# Altium PCB PCB1.PcbDoc
Units mm, origin at the board's own origin, x right, y up, seen from the top; angles counter-clockwise.
Board outline 201.68 x 78.94 mm, 2 copper layers (Top Layer, Bottom Side), stack 0.302 mm thick; 18 components, 48 nets, 160 pads, 16 vias.
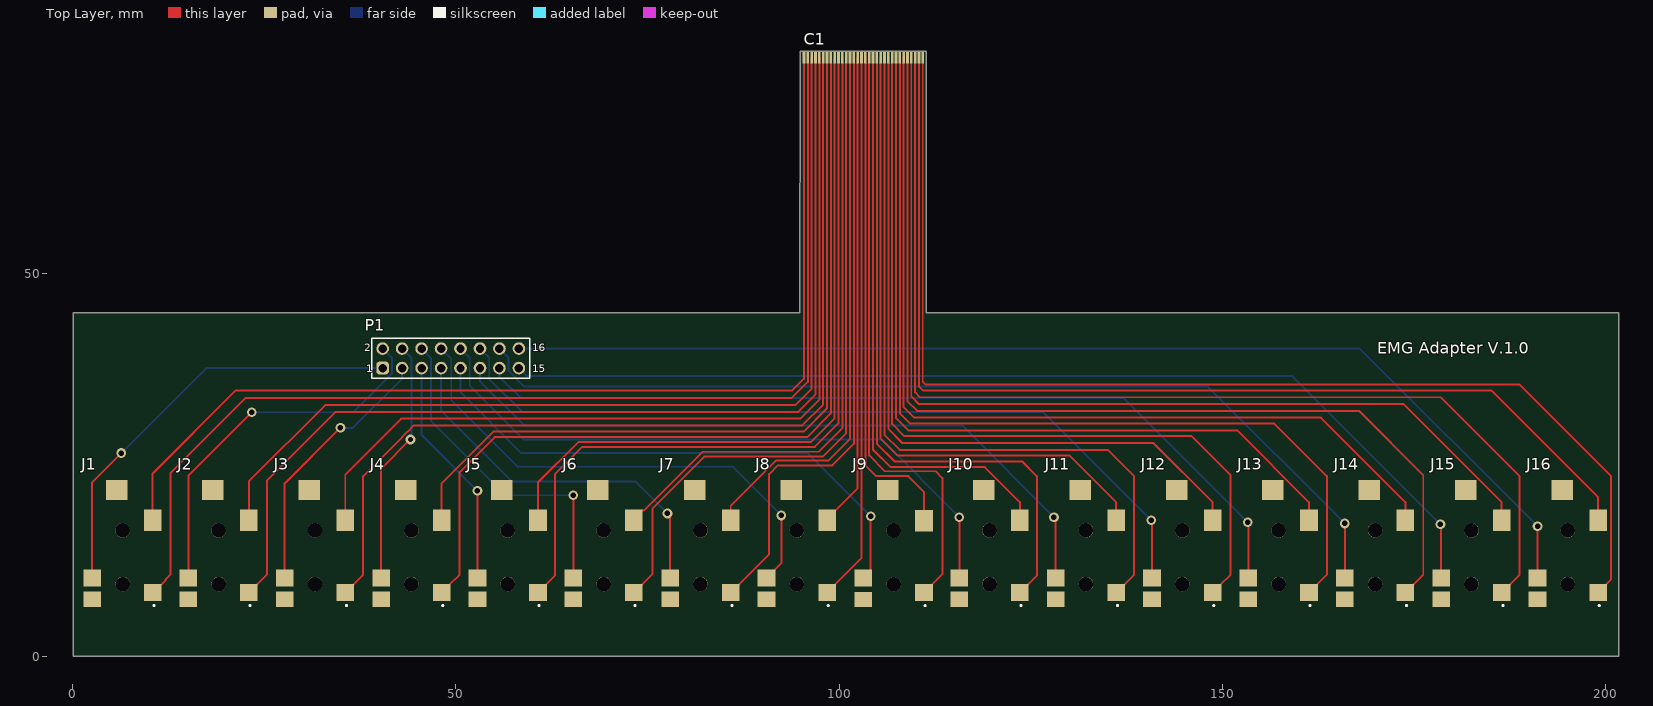
[diagram p0: Top Layer view]
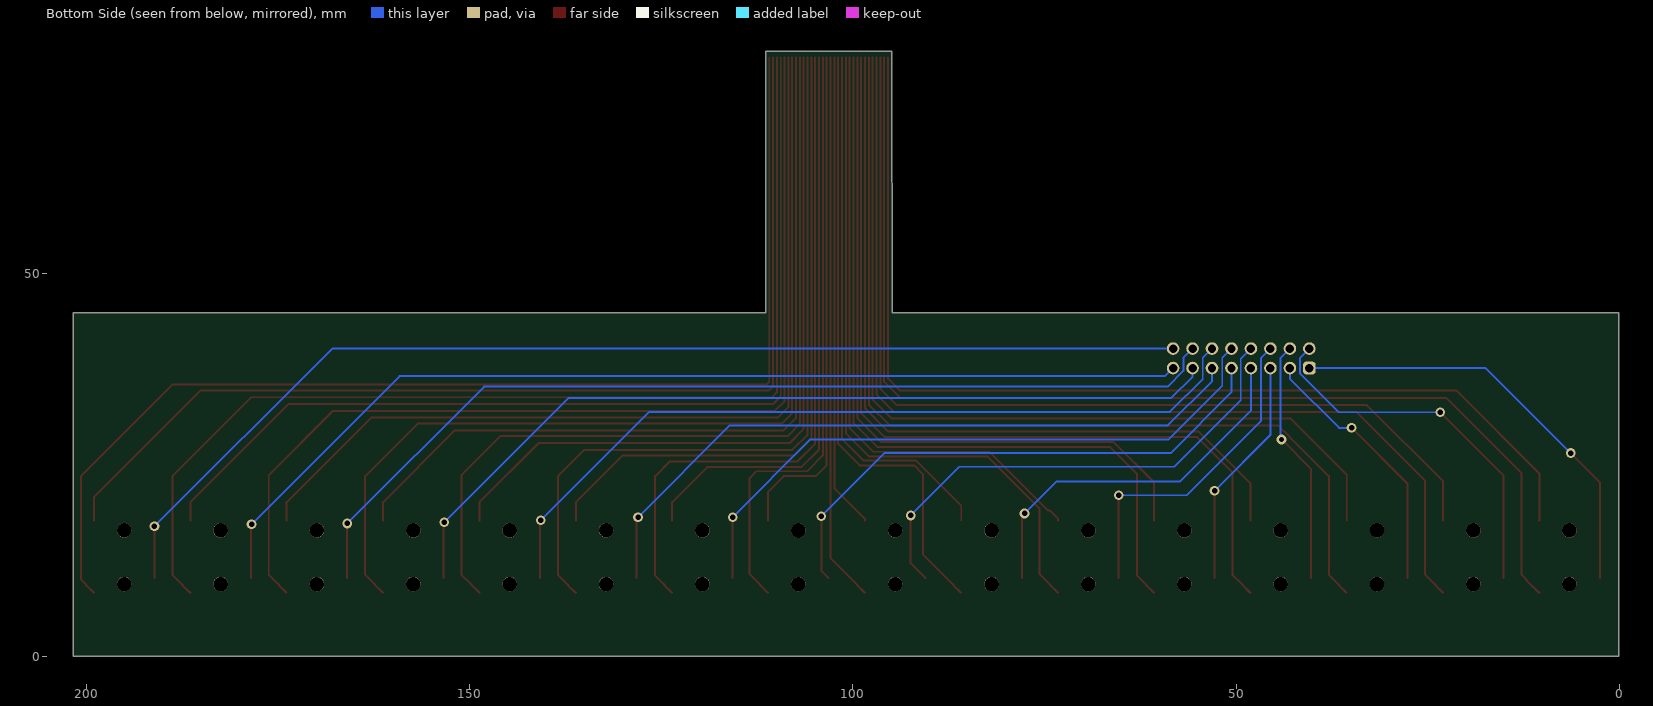
[diagram p1: Bottom Side view, seen from below]

## Layer stack, top to bottom
Top Silkscreen: prepreg 0.001, PP-006, Dk 4.1
Top Polymide: prepreg 0.025, PP-006, Dk 4.1
Top Adhesive: prepreg 0.025, PP-006, Dk 4.1
Top Layer: signal copper 0.035
Polyimide: core 0.025, Polymid, Dk 3.3
Bottom Side: signal copper 0.035
Bottom Adhesive: prepreg 0.025, PP-002, Dk 3.8
Bottom Polymide: prepreg 0.025, PP-006, Dk 2.9
Bottom Silkscreen: prepreg 0.001, PP-006, Dk 4.1
Stiffener: core 0.105, WE-CO-0041, Dk 3.8

## Board outline
0.05,0.05 0.05,44.881 94.874,44.881 94.894,78.793 cw(c95.095,78.793) 95.095,78.994 95.093,78.994 111.173,78.994 cw(c111.173,78.794) 111.373,78.794 111.374,78.794 111.374,44.881 111.378,44.881 201.726,44.881 201.726,0.05

## Design rules (kind name [scope] priority, off if disabled: settings)
AssemblyTestPointUsage [All] p0: scope1count=1 scope1_0_kind=Board scope1_0_value=Board scope2count=1 scope2_0_kind=Board scope2_0_value=Board commentlength=0
AssemblyTestpoint [All] p0: scope1count=1 scope1_0_kind=Board scope1_0_value=Board scope2count=1 scope2_0_kind=Board scope2_0_value=Board commentlength=0
Clearance [All] p0: scope1count=1 scope1_0_kind=Board scope1_0_value=Board scope2count=1 scope2_0_kind=Board scope2_0_value=Board commentlength=0 gap=0.254
Clearance [All] p1: gap=0.254 ignorepadtopadclearanceinfootprint=FALSE except(0: Arc-Hole Track-Hole SMDPad-Hole THPad-Hole Via-Hole Fill-Hole Poly-Hole Region-Hole Text-Hole; 0.126: Arc-Text Track-Text SMDPad-Text THPad-Text Via-Text Fill-Text Poly-Text Region-Text Text-Text; 0.15: Arc-Arc Arc-Track Arc-SMDPad Track-Track Track-SMDPad SMDPad-SMDPad)
ComponentClearance [All] p0: scope1count=1 scope1_0_kind=Board scope1_0_value=Board scope2count=1 scope2_0_kind=Board scope2_0_value=Board commentlength=0 gap=0.254 collisioncheckmode=3
DiffPairsRouting [All] p0: scope1count=1 scope1_0_kind=Board scope1_0_value=Board scope2count=1 scope2_0_kind=Board scope2_0_value=Board commentlength=0
DiffPairsRouting [All] p1: maxlimit=0.254 minlimit=0.254 mostfreqgap=0.254 substack1={173900B3-F3EC-4367-9330-280F2AB1E980} toplayer_{173900b3-f3ec-4367-9330-280f2ab1e980}_minwidth=0.381 toplayer_{173900b3-f3ec-4367-9330-280f2ab1e980}_maxwidth=0.381 toplayer_{173900b3-f3ec-4367-9330-280f2ab1e980}_prefwidth=0.381 bottomlayer_{173900b3-f3ec-4367-9330-280f2ab1e980}_minwidth=0.381 bottomlayer_{173900b3-f3ec-4367-9330-280f2ab1e980}_maxwidth=0.381 bottomlayer_{173900b3-f3ec-4367-9330-280f2ab1e980}_prefwidth=0.381 toplayer_minwidth=0.381 toplayer_maxwidth=0.381 toplayer_prefwidth=0.381 bottomlayer_minwidth=0.381 bottomlayer_maxwidth=0.381 bottomlayer_prefwidth=0.381 maxuncoupledlength=12.7
FabricationTestPointUsage [All] p0: scope1count=1 scope1_0_kind=Board scope1_0_value=Board scope2count=1 scope2_0_kind=Board scope2_0_value=Board commentlength=0 valid=0 allowmultiple=FALSE
FabricationTestpoint [All] p0: scope1count=1 scope1_0_kind=Board scope1_0_value=Board scope2count=1 scope2_0_kind=Board scope2_0_value=Board commentlength=0 side=3 testpointundercomponent=TRUE minsize=1.016 maxsize=2.54 preferedsize=1.524 minholesize=0 maxholesize=1.016 preferedholesize=0.813 testpointgrid=0.025
FanoutControl Fanout_BGA [All] p0 off: scope1count=1 scope1_0_kind=Board scope1_0_value=Board scope2count=1 scope2_0_kind=Board scope2_0_value=Board commentlength=69 // Protel DXP Scope 1 Expression Was: IsBGA   Fanout_BGA (Default Rule)
FanoutControl Fanout_LCC [All] p0 off: scope1count=1 scope1_0_kind=Board scope1_0_value=Board scope2count=1 scope2_0_kind=Board scope2_0_value=Board commentlength=69 // Protel DXP Scope 1 Expression Was: IsLCC   Fanout_LCC (Default Rule)
FanoutControl Fanout_SOIC [All] p0 off: scope1count=1 scope1_0_kind=Board scope1_0_value=Board scope2count=1 scope2_0_kind=Board scope2_0_value=Board commentlength=71 // Protel DXP Scope 1 Expression Was: IsSOIC   Fanout_SOIC (Default Rule)
FanoutControl Fanout_Small [All] p0 off: scope1count=1 scope1_0_kind=Board scope1_0_value=Board scope2count=1 scope2_0_kind=Board scope2_0_value=Board commentlength=84 // Protel DXP Scope 1 Expression Was: (CompPinCount < 5)   Fanout_Small (Default Rule)
FanoutControl Fanout_Default [All] p0: scope1count=1 scope1_0_kind=Board scope1_0_value=Board scope2count=1 scope2_0_kind=Board scope2_0_value=Board commentlength=30 // Fanout_Default (Default Rule)
Height [All] p0: scope1count=1 scope1_0_kind=Board scope1_0_value=Board scope2count=1 scope2_0_kind=Board scope2_0_value=Board commentlength=0
HoleSize [All] p0: scope1count=1 scope1_0_kind=Board scope1_0_value=Board scope2count=1 scope2_0_kind=Board scope2_0_value=Board commentlength=0 absolutevalues=TRUE maxlimit=2.54 minlimit=0.025 maxpercent=80.000 minpercent=20.000
HoleToHoleClearance [All] p0: scope1count=1 scope1_0_kind=Board scope1_0_value=Board scope2count=1 scope2_0_kind=Board scope2_0_value=Board commentlength=0
LayerPairs [All] p0: scope1count=1 scope1_0_kind=Board scope1_0_value=Board scope2count=1 scope2_0_kind=Board scope2_0_value=Board commentlength=0 enforce=TRUE
MinimumSolderMaskSliver [All] p0: scope1count=1 scope1_0_kind=Board scope1_0_value=Board scope2count=1 scope2_0_kind=Board scope2_0_value=Board commentlength=0
NetAntennae [All] p0: scope1count=1 scope1_0_kind=Board scope1_0_value=Board scope2count=1 scope2_0_kind=Board scope2_0_value=Board commentlength=0
PasteMaskExpansion [All] p0: scope1count=1 scope1_0_kind=Board scope1_0_value=Board scope2count=1 scope2_0_kind=Board scope2_0_value=Board commentlength=0 expansion=0
PlaneClearance [All] p0: scope1count=1 scope1_0_kind=Board scope1_0_value=Board scope2count=1 scope2_0_kind=Board scope2_0_value=Board commentlength=0 clearance=0.508
PlaneConnect [All] p0: scope1count=1 scope1_0_kind=Board scope1_0_value=Board scope2count=1 scope2_0_kind=Board scope2_0_value=Board commentlength=0 planeconnectstyle=Relief reliefexpansion=0.508 reliefentries=4 reliefconductorwidth=0.254 reliefairgap=0.254
PolygonConnect [All] p0: scope1count=1 scope1_0_kind=Board scope1_0_value=Board scope2count=1 scope2_0_kind=Board scope2_0_value=Board commentlength=0 connectstyle=Relief reliefconductorwidth=0.254 reliefentries=4 polygonreliefangle="90 Angle"
PolygonConnect [All] p1: connectstyle=Relief reliefconductorwidth=0.254 reliefentries=4 polygonreliefangle="90 Angle" airgapwidth=0.254
RoutingCorners [All] p0: scope1count=1 scope1_0_kind=Board scope1_0_value=Board scope2count=1 scope2_0_kind=Board scope2_0_value=Board commentlength=0 cornerstyle=45-Degree minsetback=2.54 maxsetback=2.54
RoutingLayers [All] p0: scope1count=1 scope1_0_kind=Board scope1_0_value=Board scope2count=1 scope2_0_kind=Board scope2_0_value=Board commentlength=0 top layer=Automatic bottom layer=Automatic
RoutingPriority [All] p0: scope1count=1 scope1_0_kind=Board scope1_0_value=Board scope2count=1 scope2_0_kind=Board scope2_0_value=Board commentlength=0
RoutingTopology [All] p0: scope1count=1 scope1_0_kind=Board scope1_0_value=Board scope2count=1 scope2_0_kind=Board scope2_0_value=Board commentlength=0 topology=Shortest
RoutingVias [All] p0: scope1count=1 scope1_0_kind=Board scope1_0_value=Board scope2count=1 scope2_0_kind=Board scope2_0_value=Board commentlength=0 holewidth=0.711 width=1.27 viastyle="Through Hole" minholewidth=0.711 minwidth=1.27 maxholewidth=0.711 maxwidth=1.27
RoutingVias [All] p1: holewidth=0.711 width=1.27 viastyle="Through Hole" minholewidth=0.711 minwidth=1.27 maxholewidth=0.711 maxwidth=1.27
ShortCircuit [All] p0: scope1count=1 scope1_0_kind=Board scope1_0_value=Board scope2count=1 scope2_0_kind=Board scope2_0_value=Board commentlength=0 allowed=FALSE
SilkToBoardRegionClearance [All] p0: scope1count=1 scope1_0_kind=Board scope1_0_value=Board scope2count=1 scope2_0_kind=Board scope2_0_value=Board commentlength=0
SilkToSilkClearance [All] p0: scope1count=1 scope1_0_kind=Board scope1_0_value=Board scope2count=1 scope2_0_kind=Board scope2_0_value=Board commentlength=0
SilkToSilkClearance [All] p1: silktosilkclearance=0.126
SilkToSolderMaskClearance [All] p0 off: scope1count=1 scope1_0_kind=Board scope1_0_value=Board scope2count=1 scope2_0_kind=Board scope2_0_value=Board commentlength=44 // Protel DXP Scope 1 Expression Was: IsPad
SolderMaskExpansion [All] p0: scope1count=1 scope1_0_kind=Board scope1_0_value=Board scope2count=1 scope2_0_kind=Board scope2_0_value=Board commentlength=0 expansion=0.102
SolderMaskExpansion [All] p1: expansion=0.102 istentingtop=FALSE
UnRoutedNet [All] p0: scope1count=1 scope1_0_kind=Board scope1_0_value=Board scope2count=1 scope2_0_kind=Board scope2_0_value=Board commentlength=0
UnpouredPolygon [All] p0: scope1count=1 scope1_0_kind=Board scope1_0_value=Board scope2count=1 scope2_0_kind=Board scope2_0_value=Board commentlength=0
Width [All] p0: scope1count=1 scope1_0_kind=Board scope1_0_value=Board scope2count=1 scope2_0_kind=Board scope2_0_value=Board commentlength=0 maxlimit=0.254 minlimit=0.254 preferedwidth=0.254
Width [All] p1: maxlimit=0.254 minlimit=0.254 preferedwidth=0.254 substack1={173900B3-F3EC-4367-9330-280F2AB1E980}
28 further rules are at their usual default settings.

## Components (designator, comment, footprint, x,y, rotation, side; value= is the part's Value field where it differs from the comment)
C1 "Male AFY5323" "Male AFY5323" 103.154,78.155 r180 top
J1 "Phone Connectors 3.5mm Audio Jack SMT 3cond Tip/Ring swtch   Source:  Datasheet" SJ23593DSMTTR 6.512,13.258 r90 top
J2 "Phone Connectors 3.5mm Audio Jack SMT 3cond Tip/Ring swtch   Source:  Datasheet" SJ23593DSMTTR 19.035,13.258 r90 top
J3 "Phone Connectors 3.5mm Audio Jack SMT 3cond Tip/Ring swtch   Source:  Datasheet" SJ23593DSMTTR 31.608,13.258 r90 top
J4 "Phone Connectors 3.5mm Audio Jack SMT 3cond Tip/Ring swtch   Source:  Datasheet" SJ23593DSMTTR 44.181,13.258 r90 top
J5 "Phone Connectors 3.5mm Audio Jack SMT 3cond Tip/Ring swtch   Source:  Datasheet" SJ23593DSMTTR 56.754,13.258 r90 top
J6 "Phone Connectors 3.5mm Audio Jack SMT 3cond Tip/Ring swtch   Source:  Datasheet" SJ23593DSMTTR 69.265,13.258 r90 top
J7 "Phone Connectors 3.5mm Audio Jack SMT 3cond Tip/Ring swtch   Source:  Datasheet" SJ23593DSMTTR 81.9,13.258 r90 top
J8 "Phone Connectors 3.5mm Audio Jack SMT 3cond Tip/Ring swtch   Source:  Datasheet" SJ23593DSMTTR 94.473,13.258 r90 top
J9 "Phone Connectors 3.5mm Audio Jack SMT 3cond Tip/Ring swtch   Source:  Datasheet" SJ23593DSMTTR 107.111,13.248 r90 top
J10 "Phone Connectors 3.5mm Audio Jack SMT 3cond Tip/Ring swtch   Source:  Datasheet" SJ23593DSMTTR 119.619,13.258 r90 top
J11 "Phone Connectors 3.5mm Audio Jack SMT 3cond Tip/Ring swtch   Source:  Datasheet" SJ23593DSMTTR 132.192,13.258 r90 top
J12 "Phone Connectors 3.5mm Audio Jack SMT 3cond Tip/Ring swtch   Source:  Datasheet" SJ23593DSMTTR 144.765,13.258 r90 top
J13 "Phone Connectors 3.5mm Audio Jack SMT 3cond Tip/Ring swtch   Source:  Datasheet" SJ23593DSMTTR 157.338,13.258 r90 top
J14 "Phone Connectors 3.5mm Audio Jack SMT 3cond Tip/Ring swtch   Source:  Datasheet" SJ23593DSMTTR 169.911,13.258 r90 top
J15 "Phone Connectors 3.5mm Audio Jack SMT 3cond Tip/Ring swtch   Source:  Datasheet" SJ23593DSMTTR 182.484,13.258 r90 top
J16 "Phone Connectors 3.5mm Audio Jack SMT 3cond Tip/Ring swtch   Source:  Datasheet" SJ23593DSMTTR 195.057,13.258 r90 top
P1 "61301621121" 61301621121 49.326,38.912 r0 top

## Footprints (in the part's own frame and the unit in brackets; to place one, negate y for a bottom-side part, rotate by r counter-clockwise, add the part's x,y. Pads: shape width x height; smd on the part's side, far side on the other; paste and mask are expansions set on the pad)
61301621121 [mm] "Pin Header, pitch 2.54 mm, THT, Vertical, dual row, 16p"
  rrect50% 1.65x1.65 hole 1.1: 1(-8.89,-1.27)
  round 1.65 hole 1.1: 2(-8.89,1.27) 3(-6.35,-1.27) 4(-6.35,1.27) 5(-3.81,-1.27) 6(-3.81,1.27) 7(-1.27,-1.27) 8(-1.27,1.27) 9(1.27,-1.27) 10(1.27,1.27) 11(3.81,-1.27) 12(3.81,1.27) 13(6.35,-1.27) 14(6.35,1.27) 15(8.89,-1.27) 16(8.89,1.27)
  silkscreen extent -10.31,-2.62 10.31,2.62
"Male AFY5323" [mm]
  rect 0.35x1.6 smd: 1(-7.75,0) 2(-7.25,0) 3(-6.75,0) 4(-6.25,0) 5(-5.75,0) 6(-5.25,0) 7(-4.75,0) 8(-4.25,0) 9(-3.75,0) 10(-3.25,0) 11(-2.75,0) 12(-2.25,0) 13(-1.75,0) 14(-1.25,0) 15(-0.75,0) 16(-0.25,0) 17(0.25,0) 18(0.75,0) 19(1.25,0) 20(1.75,0) 21(2.25,0) 22(2.75,0) 23(3.25,0) 24(3.75,0) 25(4.25,0) 26(4.75,0) 27(5.25,0) 28(5.75,0) 29(6.25,0) 30(6.75,0) 31(7.25,0) 32(7.75,0)
SJ23593DSMTTR [mm]
  rect 2.2x2.3 smd: 1(-4.9,-3.95) 3(-3,3.95)
  rect 2.8x2.3 smd: 2(4.5,-3.95)
  rect 2.6x2.8 smd: 4(8.5,0.75)
  rect 2x2.3 smd: 5(-5.8,3.95)
  round 1.9 hole 1.9 unplated: MH1(-3.8,0) MH2(3.2,0)
  silkscreen extent -6.7,-4.2 -6.5,-4

## Part data
J1 J2 J3 J4 J5 J6 J7 J8 J9 J10 J11 J12 J13 J14 J15 J16: library part SJ2-3593D-SMT-TR
P1: library part CMP-1502-01097-2

## Via types
v1: diameter 1.27, hole 0.711, Top Layer to Bottom Side, 16 vias

## Nets (pads, with @x,y where several pads share a name; then routed paths per layer and width w, separated by ;. In a path a pad name is that pad's centre, name@x,y a point inside that pad or via, vN(x,y) a via of type N, cw(c..) or ccw(c..) an arc to the next point about the centre after c; other vN are vias at no path point)
NetC1_1: C1.1 J16.1 | length 153.1
  Top Layer w0.254: C1.1 110.904,35.881 111.302,35.483 188.772,35.483 200.71,23.545 200.71,10.061 200.03,9.381 200.03,9.331 199.057,8.358 J16.1
NetC1_2: C1.2 J16.2 | length 140.5
  Top Layer w0.254: C1.2 110.404,35.238 110.921,34.721 185.089,34.721 199.007,20.803 J16.2
NetC1_3: C1.3 J15.1 | length 143.3
  Top Layer w0.254: C1.3 109.904,34.468 110.54,33.832 178.485,33.832 188.772,23.545 188.772,10.696 187.457,9.381 187.457,9.331 186.484,8.358 J15.1
NetC1_4: C1.4 J15.2 | length 129.3
  Top Layer w0.254: C1.4 109.404,33.952 110.413,32.943 173.641,32.943 186.434,20.15 J15.2
NetC1_5: C1.5 J14.1 | length 132.4
  Top Layer w0.254: C1.5 108.904,33.309 110.159,32.054 167.817,32.054 176.199,23.672 176.199,10.696 174.884,9.381 174.884,9.331 173.911,8.358 J14.1
NetC1_6: C1.6 J14.2 | length 118.6
  Top Layer w0.254: C1.6 108.404,32.539 109.778,31.165 162.846,31.165 173.861,20.15 J14.2
NetC1_7: C1.7 J13.1 | length 121.7
  Top Layer w0.254: C1.7 107.904,31.769 109.27,30.403 156.768,30.403 163.626,23.545 163.626,10.696 162.311,9.381 162.311,9.331 161.338,8.358 J13.1
NetC1_8: C1.8 J13.2 | length 107.9
  Top Layer w0.254: C1.8 107.404,31.126 109.016,29.514 151.924,29.514 161.288,20.15 J13.2
NetC1_9: C1.9 J12.1 | length 111
  Top Layer w0.254: C1.9 106.904,30.356 108.508,28.752 145.973,28.752 151.053,23.672 151.053,10.696 149.738,9.381 149.738,9.331 148.765,8.358 J12.1
NetC1_10: C1.10 J12.2 | length 97.1
  Top Layer w0.254: C1.10 106.404,29.713 108.254,27.863 141.002,27.863 148.715,20.15 J12.2
NetC1_11: C1.11 J11.1 | length 100.2
  Top Layer w0.254: C1.11 105.904,28.943 107.873,26.974 135.051,26.974 138.48,23.545 138.48,10.696 137.165,9.381 137.165,9.331 136.192,8.358 J11.1
NetC1_12: C1.12 J11.2 | length 86.3
  Top Layer w0.254: C1.12 105.404,28.427 107.619,26.212 130.08,26.212 136.142,20.15 J11.2
NetC1_13: C1.13 J10.1 | length 89.1
  Top Layer w0.254: C1.13 104.904,27.784 107.238,25.45 123.875,25.45 125.78,23.545 125.78,10.569 124.592,9.381 124.592,9.331 123.619,8.358 J10.1
NetC1_14: C1.14 J10.2 | length 75.5
  Top Layer w0.254: C1.14 104.404,27.014 106.707,24.711 119.008,24.711 123.569,20.15 J10.2
NetC1_15: C1.15 J9.1 | length 78.7
  Top Layer w0.254: C1.15 103.904,26.244 105.968,24.18 112.572,24.18 113.461,23.291 113.461,10.748 112.084,9.371 112.084,9.321 111.111,8.348 J9.1
NetC1_16: C1.16 J9.2 | length 66
  Top Layer w0.254: C1.16 103.404,24.966 104.825,23.545 109.016,23.545 111.061,21.5 J9.2
NetC1_17: C1.17 J8.1 | length 71.7
  Top Layer w0.254: J8.1 98.473,8.358 99.446,9.331 99.446,9.381 102.904,12.839 C1.17
NetC1_18: C1.18 J8.2 | length 62
  Top Layer w0.254: J8.2 98.423,18.008 102.404,21.989 C1.18
NetC1_19: C1.19 J7.1 | length 80.6
  Top Layer w0.254: J7.1 85.9,8.358 86.873,9.331 86.873,9.381 90.855,13.363 90.855,23.799 91.998,24.942 99.11,24.942 101.904,27.736 C1.19
NetC1_20: C1.20 J7.2 | length 70.9
  Top Layer w0.254: J7.2 85.85,19.683 91.744,25.577 98.602,25.577 101.404,28.379 C1.20
NetC1_21: C1.21 J6.1 | length 90.3
  Top Layer w0.254: J6.1 73.265,8.358 74.238,9.331 74.238,9.381 75.615,10.758 75.615,19.315 82.385,26.085 97.84,26.085 100.904,29.149 C1.21
NetC1_22: C1.22 J6.2 | length 80.7
  Top Layer w0.254: J6.2 73.215,18.008 74.238,19.031 74.488,19.031 82.177,26.72 97.332,26.72 100.404,29.792 C1.22
NetC1_23: C1.23 J5.1 | length 103.8
  Top Layer w0.254: J5.1 60.754,8.358 61.727,9.331 61.727,9.381 62.915,10.569 62.915,23.799 66.471,27.355 96.824,27.355 99.904,30.435 C1.23
NetC1_24: C1.24 J5.2 | length 94.2
  Top Layer w0.254: J5.2 60.704,22.731 65.963,27.99 96.316,27.99 99.404,31.078 C1.24
NetC1_25: C1.25 J4.1 | length 114.7
  Top Layer w0.254: J4.1 48.181,8.358 49.154,9.331 49.154,9.381 50.469,10.696 50.469,24.053 55.041,28.625 95.808,28.625 98.904,31.721 C1.25
NetC1_26: C1.26 J4.2 | length 105
  Top Layer w0.254: J4.2 48.131,22.604 54.914,29.387 95.427,29.387 98.404,32.364 C1.26
NetC1_27: C1.27 J3.1 | length 125.4
  Top Layer w0.254: J3.1 35.608,8.358 36.581,9.331 36.581,9.381 37.896,10.696 37.896,23.545 43.053,28.702 43.053,28.742 43.648,29.337 43.688,29.337 44.5,30.149 95.173,30.149 97.904,32.88 C1.27
NetC1_28: C1.28 J3.2 | length 116.5
  Top Layer w0.254: J3.2 35.558,23.747 42.849,31.038 94.919,31.038 97.404,33.523 C1.28
NetC1_29: C1.29 J2.1 | length 135.8
  Top Layer w0.254: J2.1 23.035,8.358 24.008,9.331 24.008,9.381 25.323,10.696 25.323,22.91 34.34,31.927 94.665,31.927 96.904,34.166 C1.29
NetC1_30: C1.30 J2.2 | length 126.7
  Top Layer w0.254: J2.2 22.985,22.858 32.943,32.816 94.284,32.816 96.404,34.936 C1.30
NetC1_31: C1.31 J1.1 | length 147
  Top Layer w0.254: J1.1@10.412,8.358 J1.1 10.512,8.358 12.112,9.958 12.112,10.058 12.75,10.696 12.75,23.926 22.529,33.705 93.776,33.705 95.904,35.833 C1.31
NetC1_32: C1.32 J1.2 | length 138.2
  Top Layer w0.254: J1.2 10.412,17.808 10.412,23.874 21.259,34.721 93.903,34.721 95.404,36.222 C1.32
Ring1: J1.3 P1.1 | length 56.6
  Top Layer w0.254: J1.3@2.512,10.258 2.512,22.705 v1(6.35,26.543)
  Bottom Side w0.254: v1(6.35,26.543) 17.449,37.642 P1.1
Ring2: J2.3 P1.2 | length 49.2
  Top Layer w0.254: J2.3 15.085,23.594 v1(23.368,31.877)
  Bottom Side w0.254: v1(23.368,31.877) 36.618,31.877 41.642,36.901 41.642,38.976 P1.2
Ring3: J3.3 P1.3 | length 34.7
  Top Layer w0.254: J3.3 27.658,22.578 v1(34.925,29.845)
  Bottom Side w0.254: v1(34.925,29.845) 36.56,29.845 42.976,36.261 P1.3
Ring4: J4.3 P1.4 | length 32.1
  Top Layer w0.254: J4.3 40.231,24.483 v1(44.069,28.321)
  Bottom Side w0.254: P1.4 44.182,38.976 44.182,28.434 v1(44.069,28.321)
Ring5: J5.3 P1.5 | length 30.4
  Top Layer w0.254: J5.3 v1(52.804,21.618)
  Bottom Side w0.254: P1.5 45.516,28.906 v1(52.804,21.618)
Ring6: J6.3 P1.6 | length 43.3
  Top Layer w0.254: J6.3 v1(65.315,21.045)
  Bottom Side w0.254: P1.6 46.722,38.976 46.722,30.748 56.425,21.045 v1(65.315,21.045)
Ring7: J7.3 P1.7 | length 49.2
  Top Layer w0.254: v1(77.597,18.669) 77.95,18.316 J7.3
  Bottom Side w0.254: P1.7 48.056,32.081 57.277,22.86 73.406,22.86 v1(77.597,18.669)
Ring8: J8.3 P1.8 | length 65.6
  Top Layer w0.254: J8.3 90.573,10.258 91.546,11.231 91.546,11.281 92.456,12.191 v1(92.456,18.415)
  Bottom Side w0.254: P1.8 49.39,38.848 49.39,33.414 58.039,24.765 86.106,24.765 v1(92.456,18.415)
Ring9: J9.3 P1.9 | length 71.8
  Top Layer w0.254: J9.3 104.111,11.198 v1(104.111,18.312)
  Bottom Side w0.254: P1.9 50.596,34.494 58.547,26.543 95.88,26.543 v1(104.111,18.312)
Ring10: J10.3 P1.10 | length 84.3
  Top Layer w0.254: J10.3 v1(115.669,18.189)
  Bottom Side w0.254: P1.10 51.802,38.976 51.802,35.32 58.801,28.321 105.537,28.321 v1(115.669,18.189)
Ring11: J11.3 P1.11 | length 92
  Top Layer w0.254: v1(128.016,18.161) 128.242,17.935 J11.3
  Bottom Side w0.254: P1.11 53.136,35.92 58.907,30.149 116.028,30.149 v1(128.016,18.161)
Ring12: J12.3 P1.12 | length 106
  Top Layer w0.254: v1(140.716,17.78) 140.815,17.681 J12.3
  Bottom Side w0.254: P1.12 54.342,38.976 54.342,36.209 58.624,31.927 126.569,31.927 v1(140.716,17.78)
Ring13: J13.3 P1.13 | length 113.9
  Top Layer w0.254: v1(153.289,17.526) 153.388,17.427 J13.3
  Bottom Side w0.254: P1.13 55.676,36.526 58.497,33.705 137.11,33.705 v1(153.289,17.526)
Ring14: J14.3 P1.14 | length 127.8
  Top Layer w0.254: J14.3 v1(165.961,17.371)
  Bottom Side w0.254: P1.14 56.882,38.976 56.882,37.27 58.927,35.225 148.107,35.225 v1(165.961,17.371)
Ring15: J15.3 P1.15 | length 135.7
  Top Layer w0.254: v1(178.435,17.272) 178.534,17.173 J15.3
  Bottom Side w0.254: P1.15 59.282,36.576 159.131,36.576 v1(178.435,17.272)
Ring16: J16.3 P1.16 | length 149.2
  Top Layer w0.254: J16.3 v1(191.107,16.99)
  Bottom Side w0.254: P1.16 167.915,40.182 v1(191.107,16.99)
pads on no net: J1.4 J1.5 J1.MH1 J1.MH2 J2.4 J2.5 J2.MH1 J2.MH2 J3.4 J3.5 J3.MH1 J3.MH2 J4.4 J4.5 J4.MH1 J4.MH2 J5.4 J5.5 J5.MH1 J5.MH2 J6.4 J6.5 J6.MH1 J6.MH2 J7.4 J7.5 J7.MH1 J7.MH2 J8.4 J8.5 J8.MH1 J8.MH2 J9.4 J9.5 J9.MH1 J9.MH2 J10.4 J10.5 J10.MH1 J10.MH2 J11.4 J11.5 J11.MH1 J11.MH2 J12.4 J12.5 J12.MH1 J12.MH2 J13.4 J13.5 J13.MH1 J13.MH2 J14.4 J14.5 J14.MH1 J14.MH2 J15.4 J15.5 J15.MH1 J15.MH2 J16.4 J16.5 J16.MH1 J16.MH2

## Silkscreen, mask and mechanical layers (free items; w line width, h text height)
Top Overlay:
  text "EMG Adapter V.1.0" at 170.18,39.497 h1.52
Flex Shape:
  lines w0.1: 94.874,75.311 94.874,44.881 111.374,44.881 111.374,75.311 94.892,75.311
Board Shape:
  lines w0.1: 95.093,78.994 111.173,78.994 cw(c111.173,78.794) 111.373,78.794 ; 95.095,78.994 ccw(c95.095,78.793) 94.894,78.793 94.874,44.881 0.05,44.881 0.05,0.05 201.726,0.05 201.726,44.881 111.378,44.881 ; 111.374,44.881 111.374,78.794
Stiffener:
  lines w0.1: 94.874,75.311 94.874,78.793 cw(c95.1,78.793) 95.1,79.018 111.178,79.018 cw(c111.178,78.792) 111.404,78.792 ; 94.874,75.326 111.374,75.326 ; 111.374,75.311 111.405,78.792 ; 0.05,0.05 201.726,0.05 ; 0.05,0.05 0.05,44.881 ; 0.05,0.05 0.05,44.881 ; 0.05,0.05 0.05,44.881 ; 0.05,0.05 201.726,0.05 ; 0.05,0.05 201.726,0.05 ; 0.05,44.881 113.624,44.881 ; 113.624,44.881 201.726,44.881 ; 113.624,44.881 201.726,44.881 ; 113.624,44.881 201.726,44.881 ; 201.726,0.05 201.726,44.881 ; 201.726,0.05 201.726,44.881 ; 201.726,0.05 201.726,44.881

## Text inside footprints (layer, text, board x,y; h text height)
P1: Top Overlay "2" at 38.006,39.812 h1.02; Top Overlay "1" at 38.306,37.112 h1.02; Top Overlay "15" at 59.946,37.112 h1.02; Top Overlay "16" at 59.946,39.812 h1.02